# EAGLE board gad (EAGLE 5.00)

Size 160 x 100 mm. Coordinates in mm from the lower left corner, seen from the top.
Outline: 0,0 160,0 160,100 0,100 0,0
Copper layers (1*16): Top 0.035mm / dielectric 1.5mm / Bottom 0.035mm
Design rules "default": minimum track width 10mil, minimum drill 24mil, track to track 8mil, track to pad 8mil, pad to pad 8mil, via to via 8mil, smd to smd 8mil, copper to edge 40mil, drill to drill 8mil, minimum pad ring 10mil, minimum via ring 8mil, stop-mask expansion 4mil, vias tented up to drill 0mil, thermal gap 10mil

## Footprints (pad centres in the part's own frame; a part is rotated, then mirrored left to right if it is on the bottom)
C2.5-2 = drill 0.813 pad 1.6 octagon: 1 -1.27,0; 2 1.27,0
DIL14 = drill 0.813 long: 1 -7.62,-3.81; 2 -5.08,-3.81; 3 -2.54,-3.81; 4 0,-3.81; 5 2.54,-3.81; 6 5.08,-3.81; 7 7.62,-3.81; 8 7.62,3.81; 9 5.08,3.81; 10 2.54,3.81; 11 0,3.81; 12 -2.54,3.81; 13 -5.08,3.81; 14 -7.62,3.81
HC18U-V = drill 0.813 round: 1 -2.54,0; 2 2.54,0

## Placement (x,y rotation side)
C1  [C2.5-2]  45.08,36.03 0 top
C2  [C2.5-2]  29.84,36.03 0 top
IC1  74LS04N  [DIL14]  41.27,62.7 0 top
Q1  [HC18U-V]  40,42.38 0 top

## Library data of the parts
C1 C2 = capacitor-wima
IC1 = 74xx-eu
Q1 = crystal

## Nets
GND: IC1.7
N$1: C1.1 IC1.1 Q1.2
N$2: C2.1 IC1.2 Q1.1
N$3: C1.2 C2.2
VCC: IC1.14

## Tracks (layer width: path | path; a pad name or v marks a point on that pad's centre or on a via)
N$1  (2 unrouted)
N$2  (2 unrouted)
N$3  (1 unrouted)